# Altium PCB dep-switches.PcbDoc
Units mm, origin at the board's own origin, x right, y up, seen from the top; angles counter-clockwise.
Board outline 36.58 x 27.43 mm, 2 copper layers (Top Layer, Bottom Layer); 20 components, 9 nets, 71 pads, 14 vias.
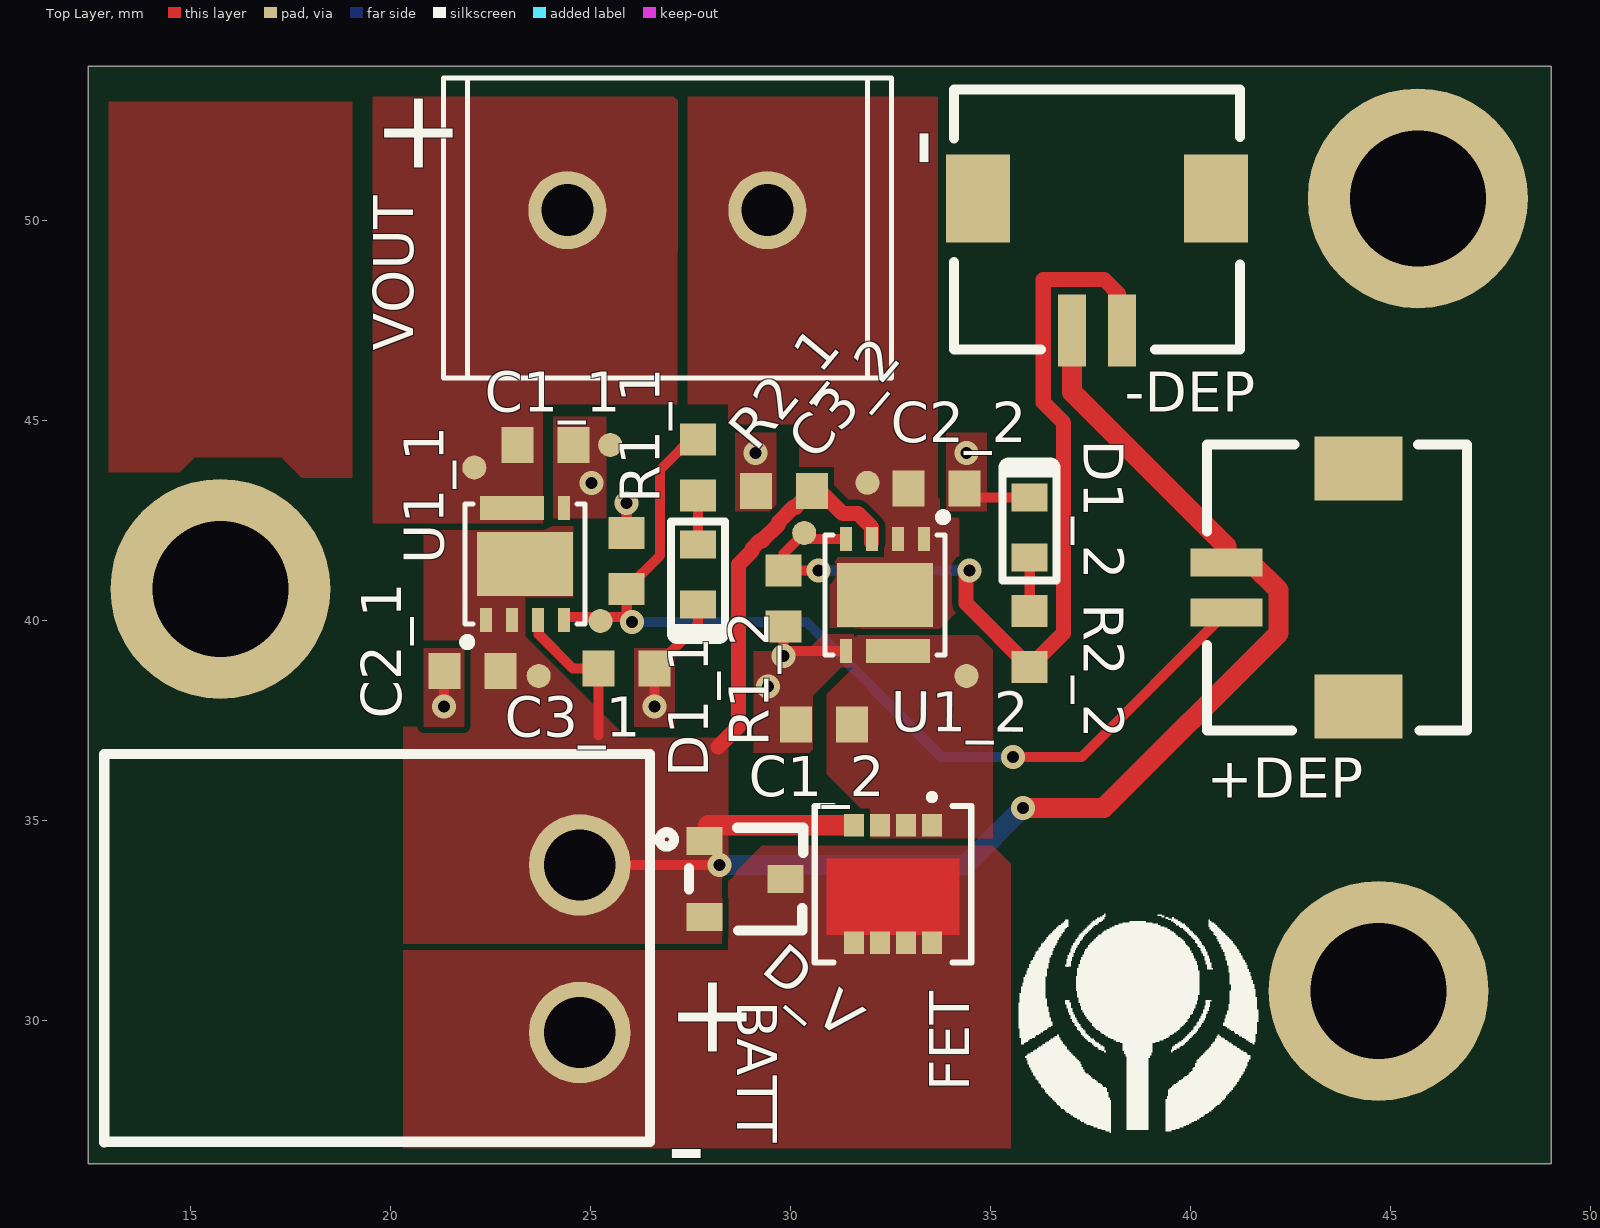
[diagram p0: Top Layer view]
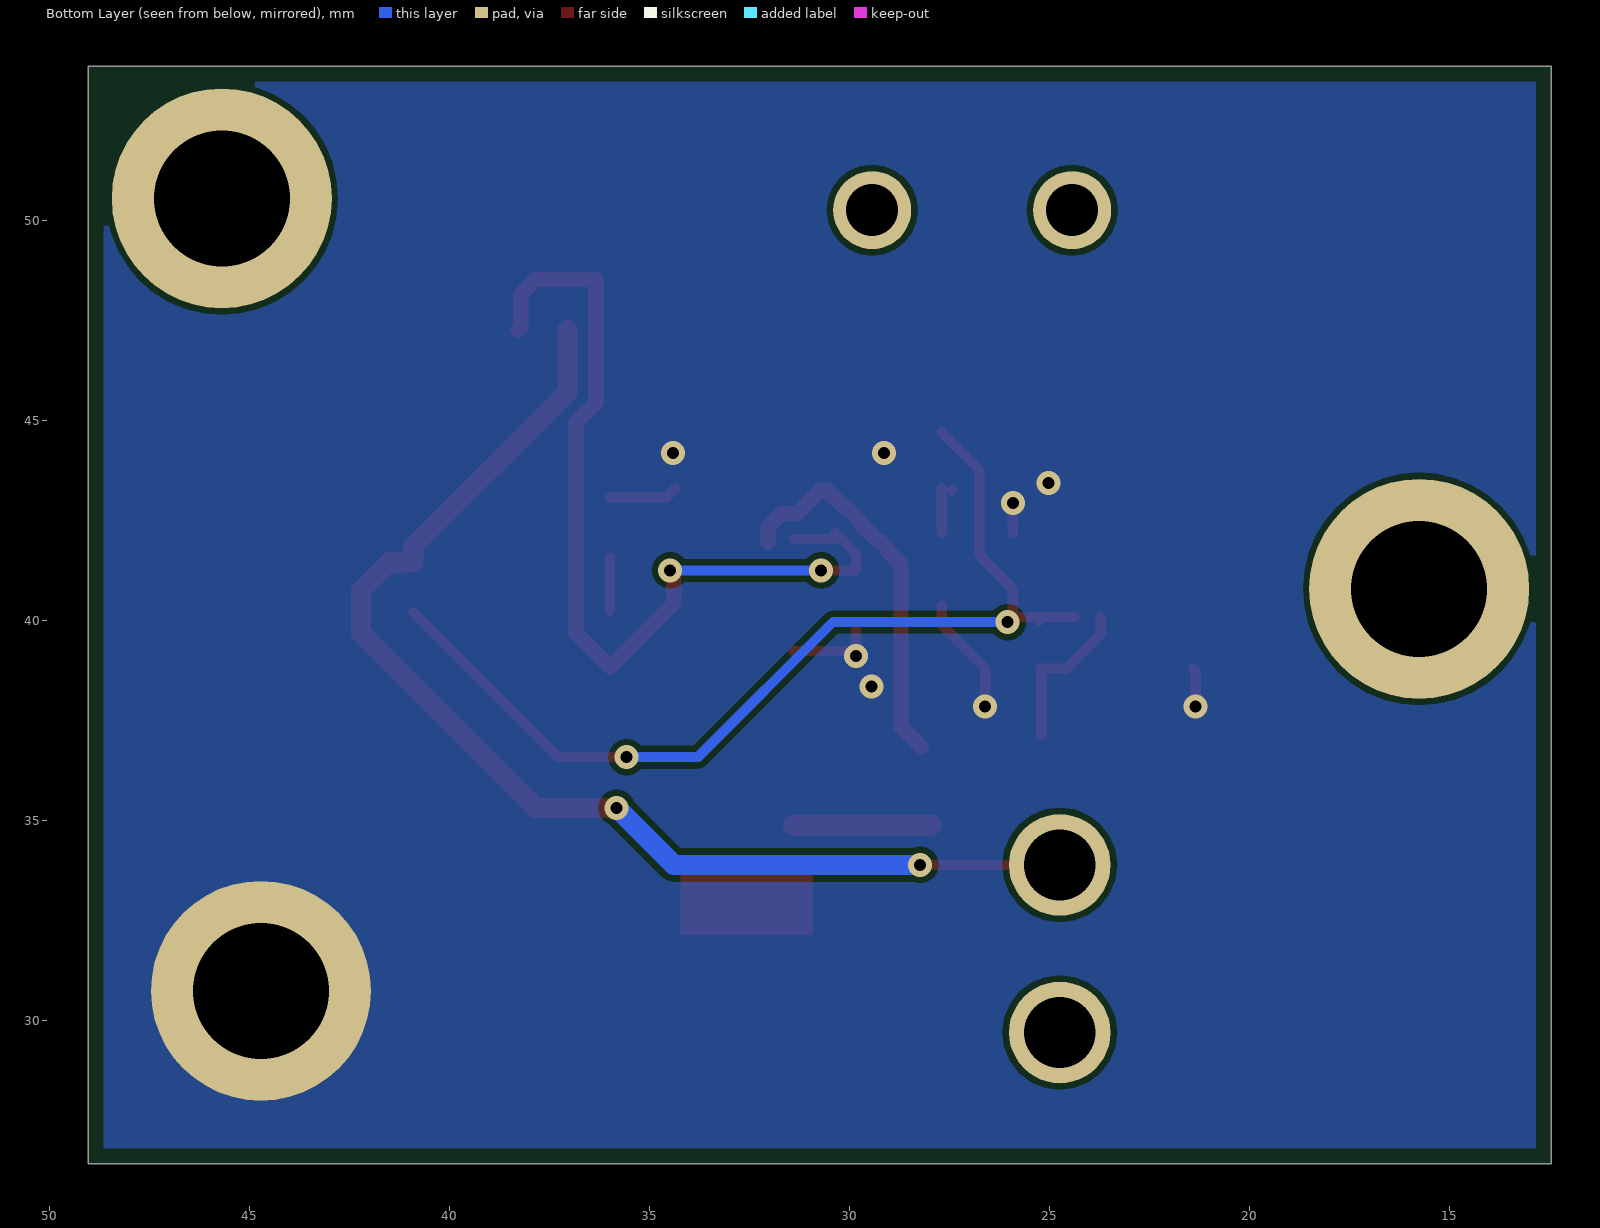
[diagram p1: Bottom Layer view, seen from below]

## Layer stack, top to bottom
Top Solder: solder mask 0.0102, Solder Resist, Dk 3.5
Top Layer: signal copper 0.0356
Dielectric 1: dielectric 0.32, FR-4, Dk 4.8
Bottom Layer: signal copper 0.0356
Bottom Solder: solder mask 0.0102, Solder Resist, Dk 3.5

## Board outline
49.022,53.848 49.022,26.416 12.446,26.416 12.446,53.848

## Design rules (kind name [scope] priority, off if disabled: settings)
AssemblyTestPointUsage [All] p1 off:
AssemblyTestpoint [All] p1 off: testpointundercomponent=TRUE minsize=1.016 maxsize=2.54 preferedsize=1.524 minholesize=0 maxholesize=1.016 preferedholesize=0.813 testpointgrid=0.025 usegrid=TRUE gridtolerance=0 allowsidetop=TRUE allowsidebottom=TRUE
BoardOutlineClearance [OnLayer('VCC') or OnLayer('GND')] p1: gap=0.508 ignorepadtopadclearanceinfootprint=FALSE // Inner layer clearance
BoardOutlineClearance BoardOutlineClearance_1 [All] p2: gap=0.381 ignorepadtopadclearanceinfootprint=FALSE // top and bottom layers
Clearance [All] p1: gap=0.152 ignorepadtopadclearanceinfootprint=FALSE
FabricationTestPointUsage [All] p1 off: valid=0 allowmultiple=FALSE
FabricationTestpoint [All] p1 off: side=3 testpointundercomponent=FALSE minsize=1.016 maxsize=2.54 preferedsize=1.524 minholesize=0 maxholesize=1.016 preferedholesize=0.813 testpointgrid=0.025 allowsidetop=TRUE allowsidebottom=TRUE usegrid=TRUE gridtolerance=0
HoleSize [All] p1: absolutevalues=TRUE maxlimit=6.3 minlimit=0.3 maxpercent=80.000 minpercent=20.000
HoleToHoleClearance [All] p1: gap=0.254 allowstackedmicrovias=FALSE
MinimumAnnularRing [All] p1: minimumring=0.152
MinimumSolderMaskSliver [All] p1: minsoldermaskwidth=0.102
PlaneConnect [All] p1: planeconnectstyle=Direct reliefexpansion=0.508 reliefentries=4 reliefconductorwidth=0.254 reliefairgap=0.254
PolygonConnect [All] p1: connectstyle=Direct reliefconductorwidth=0.254 reliefentries=4 polygonreliefangle="90 Angle" airgapwidth=0.254
RoomDefinition dep-switches [InComponentClass('dep-switches')] p1: confinementstyle=ConfineIn formatcopy=TRUE lockcomponents=FALSE outline 0.274,25.322 0.274,38.276 20.689,38.276 20.689,54.056 33.028,54.056 33.028,53.644 41.757,53.644 41.757,44.913 47.294,44.913 47.294,36.729 34.901,36.729 34.901,31.016 26.874,31.016 26.874,25.322
RoomDefinition 2 [InComponentClass('2')] p2: confinementstyle=ConfineIn formatcopy=TRUE lockcomponents=FALSE outline 28.336,42.38 28.336,44.088 32.143,44.088 32.143,44.15 34.951,44.15 34.951,44.324 37.011,44.324 37.011,40.642 36.836,40.642 36.836,38.023 32.35,38.023 32.35,36.538 29.342,36.538 29.342,39.041 28.976,39.041 28.976,42.38
RoomDefinition 1 [InComponentClass('1')] p3: confinementstyle=ConfineIn formatcopy=TRUE lockcomponents=FALSE outline 20.548,37.878 20.548,39.586 21.339,39.586 21.339,43.631 22.372,43.631 22.372,45.236 26.832,45.236 26.832,45.32 28.54,45.32 28.54,42.827 28.717,42.827 28.717,39.145 27.402,39.145 27.402,37.94 23.556,37.94 23.556,37.878
RoutingVias [All] p1: holewidth=0.3 width=0.6 viastyle="Through Hole" minholewidth=0.2 minwidth=0.6 maxholewidth=6.3 maxwidth=10
SilkToSilkClearance [All] p1: silktosilkclearance=0
SilkToSolderMaskClearance [IsPad] p1: minsilkscreentomaskgap=0.076 clearancetoexposedcopper=TRUE
SolderMaskExpansion [All] p1: expansion=0.064
UnConnectedPin [All] p1:
UnRoutedNet [All] p1: checkbadconnections=TRUE
Width [All] p1: maxlimit=2.54 minlimit=0.152 preferedwidth=0.254
19 further rules are at their usual default settings.

## Classes and differential pairs
channel class load-sw: 1 2
net class VOUT[1..2]: VIN2 VOUT1
net class VIN[1..2]: VIN1 VIN2
net class SW[1..2]: SW1 SW2
component class 2: C1_2 C2_2 C3_2 D1_2 R1_2 R2_2 U1_2
component class 1: C1_1 C2_1 C3_1 D1_1 R1_1 R2_1 U1_1
component class dep-switches: +DEP -DEP BATT D_V FET VOUT

## Components (designator, comment, footprint, x,y, rotation, side; value= is the part's Value field where it differs from the comment)
+DEP "Header 2" DF13A-2P-1.25H(21) 40.896,40.821 r270 top
-DEP "Header 2" DF13A-2P-1.25H(21) 37.665,47.246 r0 top
BATT "Header 2" SAM9552-ND 24.734,31.849 r90 top
C1_1 "1uF" 1608[0603] 23.876,44.382 r180 top (schematic designator C1)
C1_2 "1uF" 1608[0603] 30.846,37.392 r0 top (schematic designator C1)
C2_1 "10uF" 1608[0603] 22.052,38.732 r0 top (schematic designator C2)
C2_2 "10uF" 1608[0603] 33.647,43.296 r180 top (schematic designator C2)
C3_1 "1uF" 1608[0603] 25.898,38.794 r180 top (schematic designator C3)
C3_2 "1uF" 1608[0603] 29.84,43.234 r0 top (schematic designator C3)
D1_1 "SMD-LED" 0603-LED 27.686,41.148 r270 top (schematic designator D1)
D1_2 "SMD-LED" 0603-LED 35.982,42.321 r90 top (schematic designator D1)
D_V "AZ23C4V7-E3-08" AZ23C4V7-E3-08 28.865,33.528 r270 top (schematic designator D_VOLT)
FET "CSD16406Q3" CSD16406Q3 32.564,33.274 r270 top
R1_1 "50K" 1608[0603] 25.908,41.483 r270 top (schematic designator R1)
R1_2 "50K" 1608[0603] 29.83,40.545 r90 top (schematic designator R1)
R2_1 "330" 1608[0603] 27.686,43.816 r90 top (schematic designator R2)
R2_2 "330" 1608[0603] 35.982,39.527 r270 top (schematic designator R2)
U1_1 "TPS22959DNYT" TPS22959DNYT 23.368,41.402 r90 top (schematic designator U1)
U1_2 "TPS22959DNYT" TPS22959DNYT 32.37,40.626 r270 top (schematic designator U1)
VOUT "Header 2" CON2_SCREW_5.00MM_691102710002 26.924,50.252 r0 top

## Footprints (in the part's own frame and the unit in brackets; to place one, negate y for a bottom-side part, rotate by r counter-clockwise, add the part's x,y. Pads: shape width x height; smd on the part's side, far side on the other; paste and mask are expansions set on the pad)
0603-LED [mm] "0603 LED footprint, thick line on the cathode"
  rect 0.7x0.9 smd: 1(-0.75,0) 2(0.75,0)
  silkscreen extent -1.32,-0.67 1.52,0.67, body extent -0.8,-0.4 0.8,0.4, height 0.71
1608[0603] [mm] "Chip Capacitor, Body 1.6x0.8mm, IPC High Density"
  rect 0.8x0.9 smd: 1(-0.7,0) 2(0.7,0)
  body extent -0.87,-0.48 0.87,0.48, height 1.3
AZ23C4V7-E3-08 [mm] "300mW zener diode"
  rect 0.7x0.9 smd: 1(-0.947,-1.009) 2(0.953,-1.009) 3(-0.002,1.016)
  silkscreen extent -1.28,-2.13 1.28,1.45, body extent -1.45,-1.3 1.45,1.3, height 1
CON2_SCREW_5.00MM_691102710002 [mm] "2-Pos Screw terminal 5mm pitch"
  round 1.95 hole 1.3: 1(-2.5,0) 2(2.5,0)
  silkscreen extent -5.6,-4.2 5.6,3.3, body extent -5.98,-6.6 5.22,3.37, height 10.03
CSD16406Q3 [mm] "Power MOSFET"
  rect 0.56x0.5 smd paste-0.25: 1(-1.597,0.975) 2(-1.597,0.325) 3(-1.597,-0.325) 4(-1.597,-0.975) 5(1.343,-0.975) 6(1.343,-0.325) 7(1.343,0.325) 8(1.343,0.975)
  Top Layer region: -0.762,1.651 1.143,1.651 1.143,-1.651 -0.762,-1.651 -0.762,1.27
  silkscreen extent -2.38,-1.96 1.83,1.96, body extent -1.78,-1.65 1.52,1.65, height 1.1
DF13A-2P-1.25H(21) [mm] "2 pos, 1.25mm pitch DF13 connector (H125743CT-ND)"
  rect 0.7x1.8 smd: 1(-0.625,0) 2(0.625,0)
  rect 1.6x2.2 smd: ""(-2.975,3.3) ""(2.975,3.3)
  silkscreen extent -3.58,-0.48 3.58,6.02, body extent -3.58,-0.48 3.58,6.02, height 3.58
SAM9552-ND [mil] "Samtec Connector Through Hole, Right Angle 2 pos 0.165\" (4.20mm) pitch"
  round 100 hole 70 mask+3: 1(80,0) 2(-85,0)
  silkscreen extent -193,-69 189,468, body extent -247,-19 243,953, height 386
TPS22959DNYT [mm]
  rect 0.6x0.3 smd: 1(-1.4,0.975) 2(-1.4,0.325) 3(-1.4,-0.325) 4(-1.4,-0.975) 5(1.4,-0.975)
  rect 0.6x1.6 smd: 8(1.4,0.325)
  rect 1.6x2.4 smd: 9(0,0)
  silkscreen extent -2.05,-1.5 1.5,1.55, body extent -1.5,-1.5 1.5,1.5, height 0.8

## Part data
+DEP -DEP: "Header, 2-Pin", Manufacturer=Hirose, Manufacturer Part Number=DF13A-2P-1.25H(21), Package Quantity=1000, Supplier Part Number 1=H125743CT-ND, Contact Gender=Male, Contact Material=Brass, Housing Material=Polyamide, LatestRevisionDate=17-Jul-2002, LatestRevisionNote="Re-released for DXP Platform.", Lead Free="Lead Free", Number of Positions=2, Number of Rows=1, Packaging="Tape and Reel", Pitch=1.25mm, Pricing 1="1=0.43, 10=0.403, 100=0.3087, 500=0.2684 (USD)", Publisher="Altium Limited", Stock 1=4810, Supplier 1=Digi-Key, Termination=SMD/SMT
BATT: "Header, 2-Pin", Manufacturer=Samtec, Manufacturer Part Number=IPBT-102-H1-T-S-RA-K, Supplier Part Number 1=SAM9552-ND, ComponentLink1Description=http://www.samtec.com/documents/webfiles/pdf/ipbt.pdf?src-supplier=Avnet, ComponentLink1URL=http://www.samtec.com/documents/webfiles/pdf/ipbt.pdf?src-supplier=Avnet, Gender=Male, LatestRevisionDate=17-Jul-2002, LatestRevisionNote="Re-released for DXP Platform.", Mount="Through Hole", Number of Contacts=2, Orientation="Right Angle", Packaging=Rail/Tube, Pitch=4.19mm, Pricing 1="1=1.39, 57=1.13298, 114=1.08149, 513=0.90125, 1026=0.7725, 5016=0.68495, 10032=0.6695 (USD)", Publisher="Altium Limited", Radiation Hardening=No, Stock 1=4351, Supplier 1=Digi-Key, Termination=Solder
C1_1 C1_2 C2_1 C2_2 C3_1 C3_2: library part "Cap Semi", "Capacitor (Semiconductor SIM Model)", LatestRevisionDate=29-May-2009, LatestRevisionNote="IPC-7351 Footprint Added.", PackageDescription="Chip Capacitor", PackageReference=C1206, Published=8-Jun-2000, Publisher="Altium Limited"
D1_1 D1_2: library part LED, "Just a generic LED"
D_V: "300mW zener diode", Case/Package=SOT-23, Manufacturer=Vishay, Max Operating Temperature=150°C, Max Power Dissipation=300mW, Min Operating Temperature=-55°C, Package Quantity=3000, Supplier Part Number 1=AZ23C4V7-E3-08GICT-ND, Tolerance=5%, Zener Voltage=4.7V, Element Configuration="Common Anode", Impedance=78R, Manufacturer Part Number=AZ23C4V7-E3-08, Mount="Surface Mount", Number of Pins=3, Packaging="Tape and Reel", Power Dissipation=300mW, Pricing 1="1=0.31, 10=0.255, 25=0.2132, 100=0.135, 250=0.10424, 500=0.08884, 1000=0.06041 (USD)", REACH SVHC=Unknown, Stock 1=7800, Supplier 1=Digi-Key, Voltage Tolerance=5%, Weight=0.00031oz
FET: "Power MOSFET", Case/Package=QFN, Continuous Drain Current (ID)=60A, Drain to Source Breakdown Voltage=25V, Gate to Source Voltage (Vgs)=16V, Input Capacitance=1.1nF, Manufacturer="Texas Instruments", Max Operating Temperature=150°C, Max Power Dissipation=2.7W, Min Operating Temperature=-55°C, Package Quantity=1, Supplier Part Number 1=296-24251-1-ND, Threshold Voltage=1.7V, ComponentLink1Description=http://www.ti.com/general/docs/lit/getliterature.tsp?genericPartNumber=CSD16406Q3&&fileType=pdf&src-supplier=Avnet, ComponentLink1URL=http://www.ti.com/general/docs/lit/getliterature.tsp?genericPartNumber=CSD16406Q3&&fileType=pdf&src-supplier=Avnet, ComponentLink2Description=http://www.ti.com/lit/ds/symlink/csd16406q3.pdf?src-supplier=Digi-Key, ComponentLink2URL=http://www.ti.com/lit/ds/symlink/csd16406q3.pdf?src-supplier=Digi-Key, ComponentLink3Description=http://www.mouser.com/ds/2/405/slps202a-128073.pdf?src-supplier=Mouser, ComponentLink3URL=http://www.mouser.com/ds/2/405/slps202a-128073.pdf?src-supplier=Mouser, ComponentLink4Description=http://www.farnell.com/datasheets/483980.pdf?src-supplier=Farnell, ComponentLink4URL=http://www.farnell.com/datasheets/483980.pdf?src-supplier=Farnell, ComponentLink5Description=http://www.ti.com/general/docs/lit/getliterature.tsp?genericPartNumber=CSD16406Q3&amp;&amp;fileType=pdf&src-supplier=Farnell, ComponentLink5URL=http://www.ti.com/general/docs/lit/getliterature.tsp?genericPartNumber=CSD16406Q3&amp;&amp;fileType=pdf&src-supplier=Farnell, ComponentLink6Description=http://www.farnell.com/simulation/1744921.zip?src-supplier=Element14, ComponentLink6URL=http://www.farnell.com/simulation/1744921.zip?src-supplier=Element14, Contact Plating=Tin,Matte, Drain to Source Voltage (Vdss)=25V, Dual Supply Voltage=25V, Element Configuration=Single, Fall Time=4.8ns, Lead Free="Contains Lead", Manufacturer Part Number=CSD16406Q3, Mount="Surface Mount", Nominal Vgs=1.7V, Number of Elements=1, Number of Pins=8, Packaging="Tape and Reel", Power Dissipation=2.7W, Pricing 1="1=1.16, 10=1.031, 100=0.8151, 500=0.63212, 1000=0.49904 (USD)", Radiation Hardening=No, Rds On Max=5.3mR, REACH SVHC="No SVHC", Rise Time=12.9ns, Stock 1=25901, Supplier 1=Digi-Key, Termination=SMD/SMT, Turn-Off Delay Time=8.5ns, Turn-On Delay Time=7.3ns
R1_1 R1_2 R2_1 R2_2: library part Res1, "Resistor", LatestRevisionDate=17-Jul-2002, LatestRevisionNote="Re-released for DXP Platform.", PackageDescription="Axial Device, Thru-Hole; 2 Leads; 0.3 in Pin Spacing", PackageReference=AXIAL-0.3, Published=8-Jun-2000, Publisher="Altium Limited"
U1_1 U1_2: "5.5V, 15A, 4.4mΩ Load Switch with Quick Output Discharge 8-WSON -40 to 85", Manufacturer="Texas Instruments", Max Operating Temperature=85°C, Min Operating Temperature=-40°C, Package="WSON-8 Texas Instruments", Quiescent Current=20.4uA, Supplier Part Number 1=296-47872-1-ND, ComponentLink1Description=http://www.ti.com/general/docs/lit/getliterature.tsp?genericPartNumber=TPS22959&&fileType=pdf&src-supplier=Avnet, ComponentLink1URL=http://www.ti.com/general/docs/lit/getliterature.tsp?genericPartNumber=TPS22959&&fileType=pdf&src-supplier=Avnet, Digi-Key_Part_Number=296-47872-1-ND, Digi-Key_Purchase_URL=https://www.digikey.ca/product-detail/en/texas-instruments/TPS22959DNYT/296-47872-1-ND/8133221?utm_source=snapeda&utm_medium=aggregator&utm_campaign=symbol, Lead Free="Lead Free", Manufacturer Part Number=TPS22959DNYT, MF="Texas Instruments", Mount="Surface Mount", MP=TPS22959DNYT, Number of Channels=1, Number of Outputs=1, Number of Pins=8, Pricing 1="1=1.91, 10=1.711, 100=1.3756 (USD)", SnapEDA_Link=https://www.snapeda.com/parts/TPS22959DNYT/Texas%20Instruments/view-part/?ref=snap, Stock 1=2432, Supplier 1=Digi-Key
VOUT: "Header, 2-Pin", Color=Blue, Current=15A, Manufacturer="Wurth Electronics", Manufacturer Part Number=691102710002, Max Operating Temperature=105°C, Min Operating Temperature=-40°C, Package Quantity=900, Supplier Part Number 1=732-2028-ND, Voltage=300V, ComponentLink1Description=https://katalog.we-online.de/em/datasheet/6911027100xx.pdf?src-supplier=Digi-Key, ComponentLink1URL=https://katalog.we-online.de/em/datasheet/6911027100xx.pdf?src-supplier=Digi-Key, ComponentLink2Description=http://www.produktinfo.conrad.com/datenblaetter/1000000-1099999/001088592-da-01-en-WR_TBL_TERMINAL_BLOCK102_691102710002.pdf?src-supplier=Conrad, ComponentLink2URL=http://www.produktinfo.conrad.com/datenblaetter/1000000-1099999/001088592-da-01-en-WR_TBL_TERMINAL_BLOCK102_691102710002.pdf?src-supplier=Conrad, Contact Material=Brass, Contact Plating=Tin, Current Rating=15A, Height=13.4mm, Housing Material=Nylon, LatestRevisionDate=17-Jul-2002, LatestRevisionNote="Re-released for DXP Platform.", Length=7.5mm, Mount="Through Hole", Number of Contacts=2, Number of Levels=1, Number of Positions Per Level=2, Packaging=Bulk, Pitch=0.197inch, Plating=Steel, Pricing 1="1=0.69, 10=0.616, 50=0.532, 100=0.5 (USD)", Publisher="Altium Limited", REACH SVHC=Unknown, Stock 1=735, Stripping Length=-6mm, Supplier 1=Digi-Key, Termination=Screw, Voltage Rating=300V, Width=11.2mm, Wire/Cable Gauge=22AWG, Wire Gauge (Max)=22AWG, Wire Gauge (Min)=14AWG

## Free pads (board coordinates)
  round 0.6 smd: 4(22.098,43.816) 4(23.708,38.608) 4(25.25,39.979) 4(25.495,44.382) 4(30.344,42.182) 4(31.924,43.435) 4(34.402,38.608)
  round 5.5 hole 3.4 unplated: ""(15.748,40.783) ""(44.704,30.734) ""(45.683,50.546)

## Via types
v1: diameter 0.6, hole 0.3, Top Layer to Bottom Layer, tented both sides, 14 vias

## Nets (pads, with @x,y where several pads share a name; then routed paths per layer and width w, separated by ;. In a path a pad name is that pad's centre, name@x,y a point inside that pad or via, vN(x,y) a via of type N, cw(c..) or ccw(c..) an arc to the next point about the centre after c; other vN are vias at no path point)
GND: BATT.2 D_V.3 FET.5 FET.6 FET.7 FET.8
NetD1_1_1: D1_1.1 R2_1.1 | length 1.1
  Top Layer w0.254: D1_1.1@27.686,42.182 R2_1.1@27.686,43.301
NetD1_2_1: D1_2.1 R2_2.1 | length 1.3
  Top Layer w0.254: R2_2.1 D1_2.1
SW1: +DEP.2 pad.4@25.25,39.979 R1_1.2 R2_1.2 U1_1.4 | length 25
  Top Layer w0.254: U1_1.4@24.358,40.083 pad.4@25.146,40.083 ; pad.4@25.25,39.979 pad.4@25.146,40.083 ; v1(26.038,39.953) v1@25.908,40.083 ; R2_1.2@27.686,44.701 26.739,43.754 26.739,41.614 R1_1.2 v1@25.908,40.083 ; v1(35.56,36.576) 37.276,36.576 +DEP.2 ; pad.4@25.146,40.083 v1@25.908,40.083
  Bottom Layer w0.254: v1(26.038,39.953) 30.405,39.953 33.782,36.576 v1(35.56,36.576)
SW2: -DEP.2 pad.4@30.344,42.182 R1_2.2 R2_2.2 U1_2.4 | length 23.4
  Top Layer w0.254: pad.4@30.344,42.182 pad.4@30.188,42.026 ; v1@30.734,41.245 v1(30.703,41.245) R1_2.2 29.83,41.667 pad.4@30.188,42.026 ; U1_2.4 pad.4@30.188,42.026
  Top Layer w0.381: v1(34.475,41.245) 34.386,41.156 34.386,40.423 R2_2.2 36.83,39.676 36.83,44.937 36.322,45.445 36.322,48.514 37.846,48.514 38.201,48.159 38.201,47.335 -DEP.2
  Bottom Layer w0.254: v1(30.703,41.245) v1(34.475,41.245)
VIN1: +DEP.1 -DEP.1 BATT.1 C2_1.2 C3_1.2 C3_2.2 D_V.1 D_V.2 FET.4 pad.4@23.708,38.608 U1_1.1 U1_1.2 U1_1.3 U1_1.9 U1_2.3 | length 47
  Top Layer w0.254: U1_1.3@23.708,40.083 23.708,39.648 24.562,38.794 C3_1.2 25.198,37.136 ; BATT.1 v1(28.226,33.881)
  Top Layer w0.381: 28.194,36.83 28.702,37.338 28.702,41.396 29.037,41.731 29.037,41.787 29.237,41.987 29.293,41.987 29.702,42.396 29.702,42.448 30.078,42.825 30.131,42.825 C3_2.2 30.741,43.234 31.306,42.668 31.687,42.668 32.03,42.326 U1_2.3@32.03,41.945
  Top Layer w0.508: 27.94,34.871 FET.4@31.395,34.871 ; v1(35.814,35.306) 37.831,35.306 42.202,39.678 42.202,40.745 41.501,41.446 +DEP.1 40.896,41.846 37.04,45.702 -DEP.1
  Bottom Layer w0.508: v1(28.226,33.881) 34.389,33.881 v1(35.814,35.306)
VIN2: C2_2.2 pad.4@31.924,43.435 U1_2.1 U1_2.2 U1_2.9 VOUT.2
VOUT1: C1_1.2 pad.4@22.098,43.816 U1_1.8 VOUT.1
VOUT2: C1_1.1 C1_2.1 C1_2.2 C2_1.1 C2_2.1 C3_1.1 C3_2.1 D1_1.2 D1_2.2 FET.1 FET.2 FET.3 pad.4@25.495,44.382 pad.4@34.402,38.608 pad.@44.704,30.734 R1_1.1 R1_2.1 U1_1.5 U1_2.5 U1_2.8 | length 8.8
  Top Layer w0.254: v1(21.336,37.846) 21.336,38.732 C2_1.1@21.398,38.794 ; R1_1.1 v1(25.908,42.926) ; v1(26.598,37.846) C3_1.1 27.686,39.882 D1_1.2@27.686,40.369 ; R1_2.1 v1(29.83,39.102) 29.954,39.226 U1_2.5 ; C2_2.1 34.571,43.071 D1_2.2
  other v1: 29.439,38.34 25.022,43.434 29.133,44.182 34.402,44.182
pads on no net: +DEP. -DEP.

## Polygon pours and split planes (outlines as drawn)
GND on Top Layer "Top Layer-GND 6" (solid, pour order 47): 12.954,52.96 12.954,43.694 14.732,43.694 15.108,44.07 17.272,44.07 17.78,43.562 19.05,43.562 19.05,52.96
VIN2 on Top Layer "Top Layer-VIN2 1" (solid, remove dead copper, pour order 46): 33.677,43.071 34.215,42.533 34.215,40.268 33.677,39.73 30.988,39.73 30.988,41.614 30.226,42.376 30.226,44.896 28.448,44.896 28.448,45.398 27.432,45.398 27.432,53.086 33.677,53.086
no net on Top Layer "Top Layer-No Net" (solid, pour order 42): 30.988,39.73
VOUT2 on Top Layer "Top Layer-VOUT2 1" (solid, remove dead copper, pour order 40): 31.75,39.624 35.028,39.624 35.052,39.648 35.052,34.544 32.004,34.544 32.004,35.052 30.912,36.144 30.912,38.15 31.589,38.827 31.589,39.648
VOUT2 on Top Layer "Top Layer-GND" (solid, pour order 16): 29.641,44.69 29.64,42.726 28.624,42.726 28.625,44.69
VIN1 on Top Layer "Top Layer-VIN1" (solid, pour order 34): 22.052,31.75 20.32,31.75 20.32,37.338 21.844,37.338 21.844,39.498 20.828,39.498 20.828,42.35 24.576,42.35 24.576,40.572 23.368,40.572 23.368,39.598 25.908,37.058 28.448,37.058 28.448,31.75
GND on Top Layer "Top Layer-VIN2" (solid, pour order 10): 35.504,31.75 35.504,33.911 35.052,34.363 29.283,34.363 28.448,33.528 28.448,31.75 20.32,31.75 20.32,26.416 35.504,26.416
VOUT1 on Top Layer "Top Layer-VOUT2" (solid, pour order 30): 23.814,45.398 27.176,45.398 27.179,53.086 19.558,53.086 19.558,42.418 23.814,42.418
VOUT2 on Top Layer "Top Layer-GND 1" (solid, pour order 28): 20.828,37.338 20.828,39.302 21.844,39.302 21.844,37.338
VOUT2 on Top Layer "Top Layer-GND 2" (solid, pour order 26): 26.09,37.338 26.09,39.302 27.106,39.302 27.106,37.338
VOUT2 on Top Layer "Top Layer-GND 3" (solid, pour order 24): 34.91,44.69 34.91,42.726 33.894,42.726 33.894,44.69
VOUT2 on Top Layer "Top Layer-GND 4" (solid, pour order 20): 30.4,39.228 30.82,39.648 31.589,39.648 31.589,38.827 31.269,38.827 30.554,38.113 30.554,36.688 29.081,36.688 29.081,39.228
VOUT2 on Top Layer "Top Layer-GND 5" (solid, pour order 6): 24.068,42.546 24.068,45.086 25.4,45.086 25.4,42.546
VOUT2 on Bottom Layer "Bottom Layer-GND" (solid, remove dead copper, pour order 32): 49.022,53.848 12.446,53.848 12.446,26.416 49.022,26.416

## Silkscreen, mask and mechanical layers (free items; w line width, h text height)
Top Overlay:
  drawing of 21 lines, arcs and shapes, not listed
  text "+" at 19.558,51.308 h2
  text "-" at 34.09,51.308 h2 r90
  text "+" at 26.91,29.21 h2
  text "-" at 26.91,25.908 h2
Top Solder:
  text "!" at 19.558,44.07 h7.71 r90.36

## Text inside footprints (layer, text, board x,y; h text height)
VOUT: Mechanical 4 "1" at 23.274,52.902 h1.88 r180; Mechanical 4 "1" at 23.274,52.902 h1.88 r180